# Altium PCB KeyBaord_V0.1.PcbDoc
Units mil, origin at the board's own origin, x right, y up, seen from the top; angles counter-clockwise.
Board outline 787.4 x 866.14 mil, 2 copper layers (Top Layer, Bottom Layer); 26 components, 24 nets, 99 pads, 44 vias.
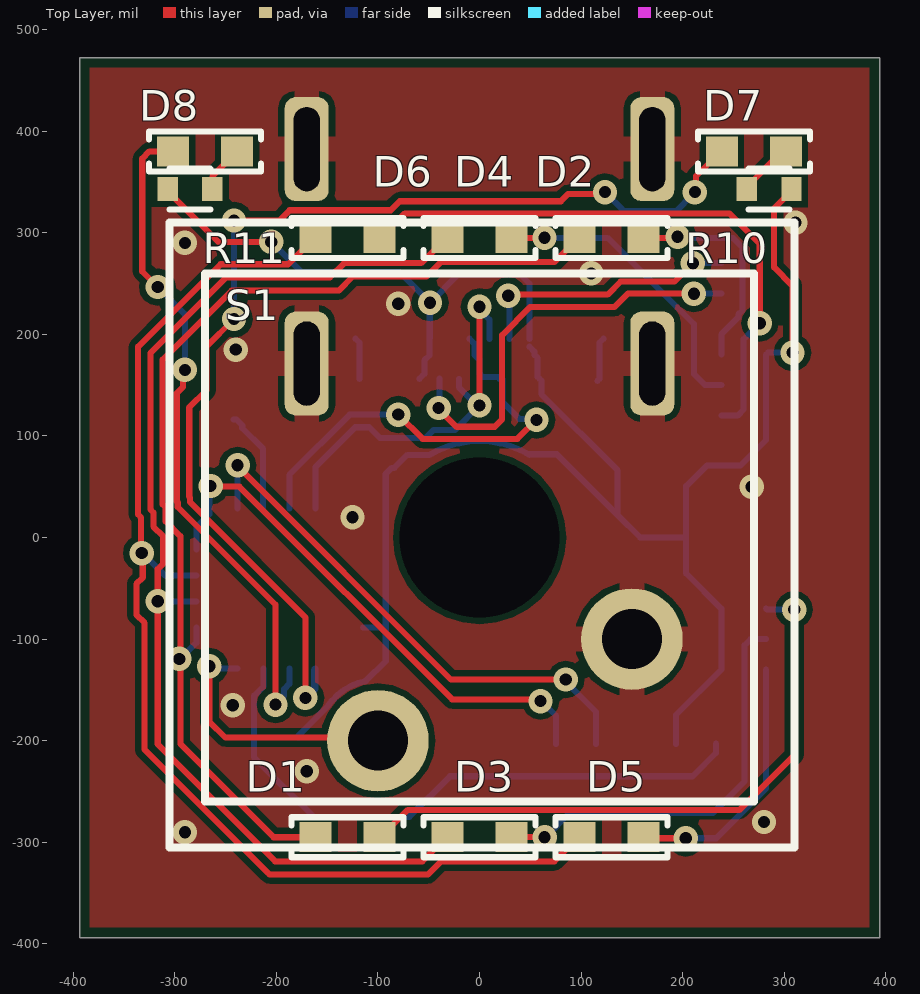
[diagram p0: Top Layer view]
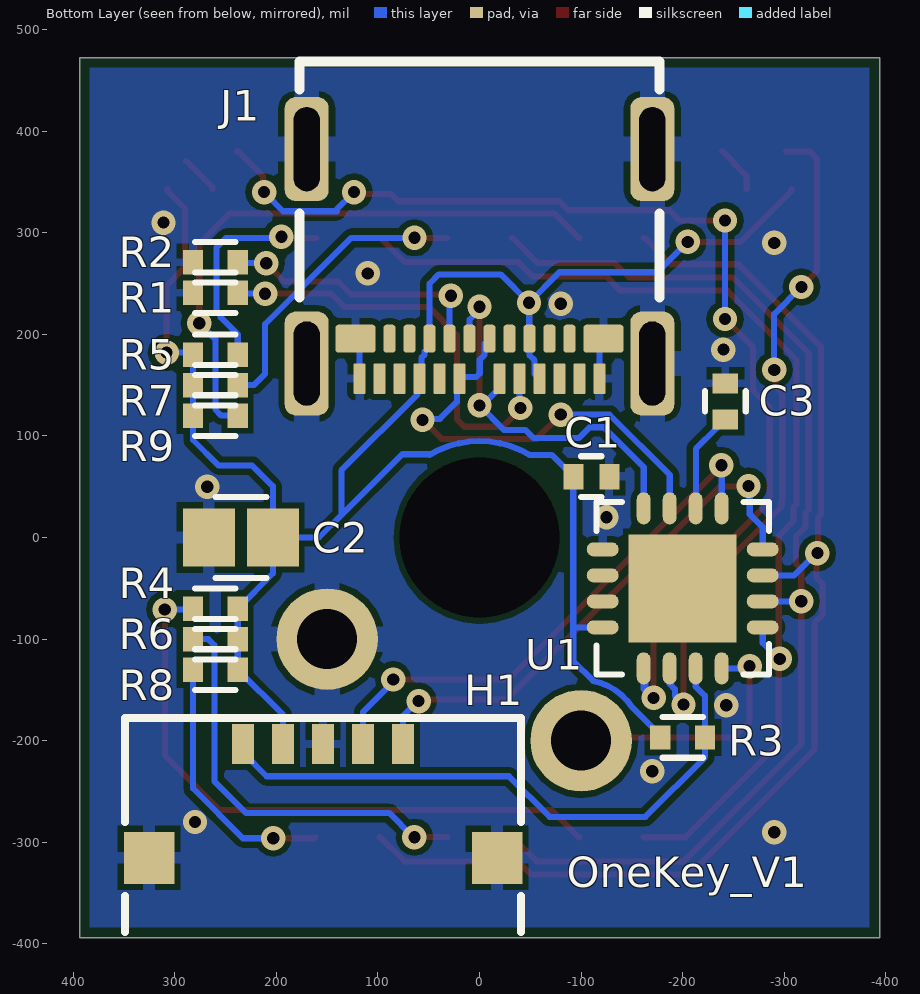
[diagram p1: Bottom Layer view, seen from below]
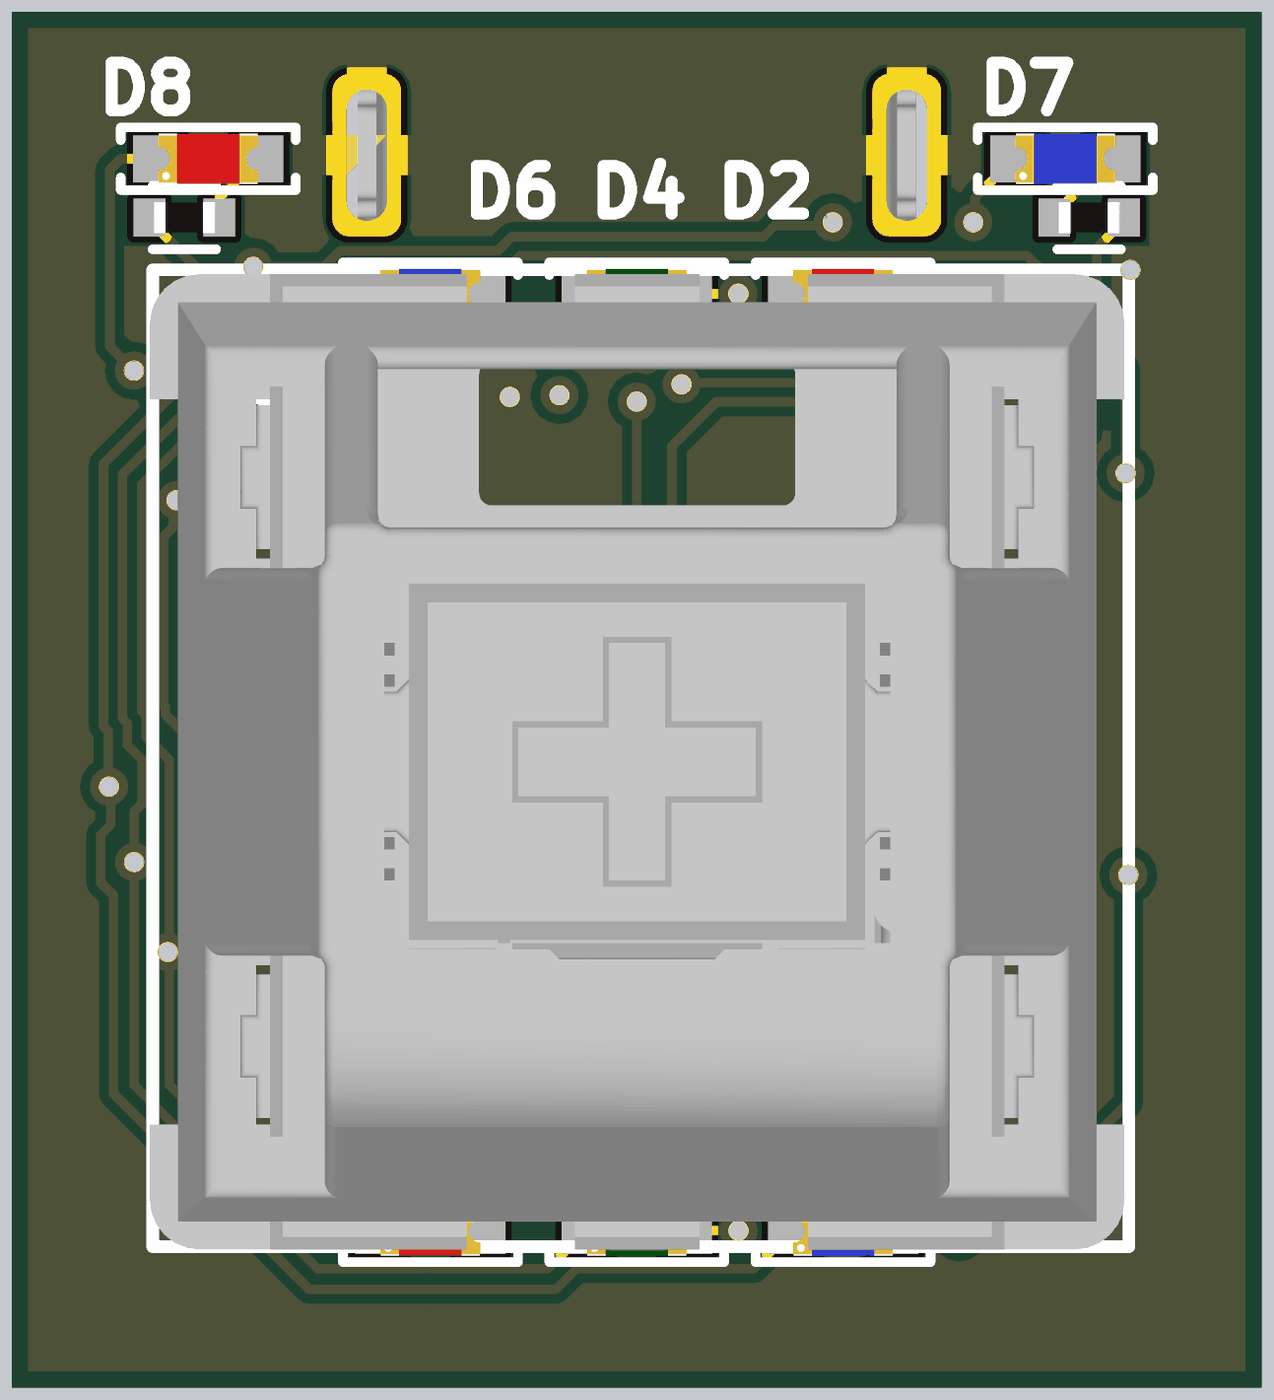
[diagram p2: 3D render of the assembled board from above, using the file's embedded part models]
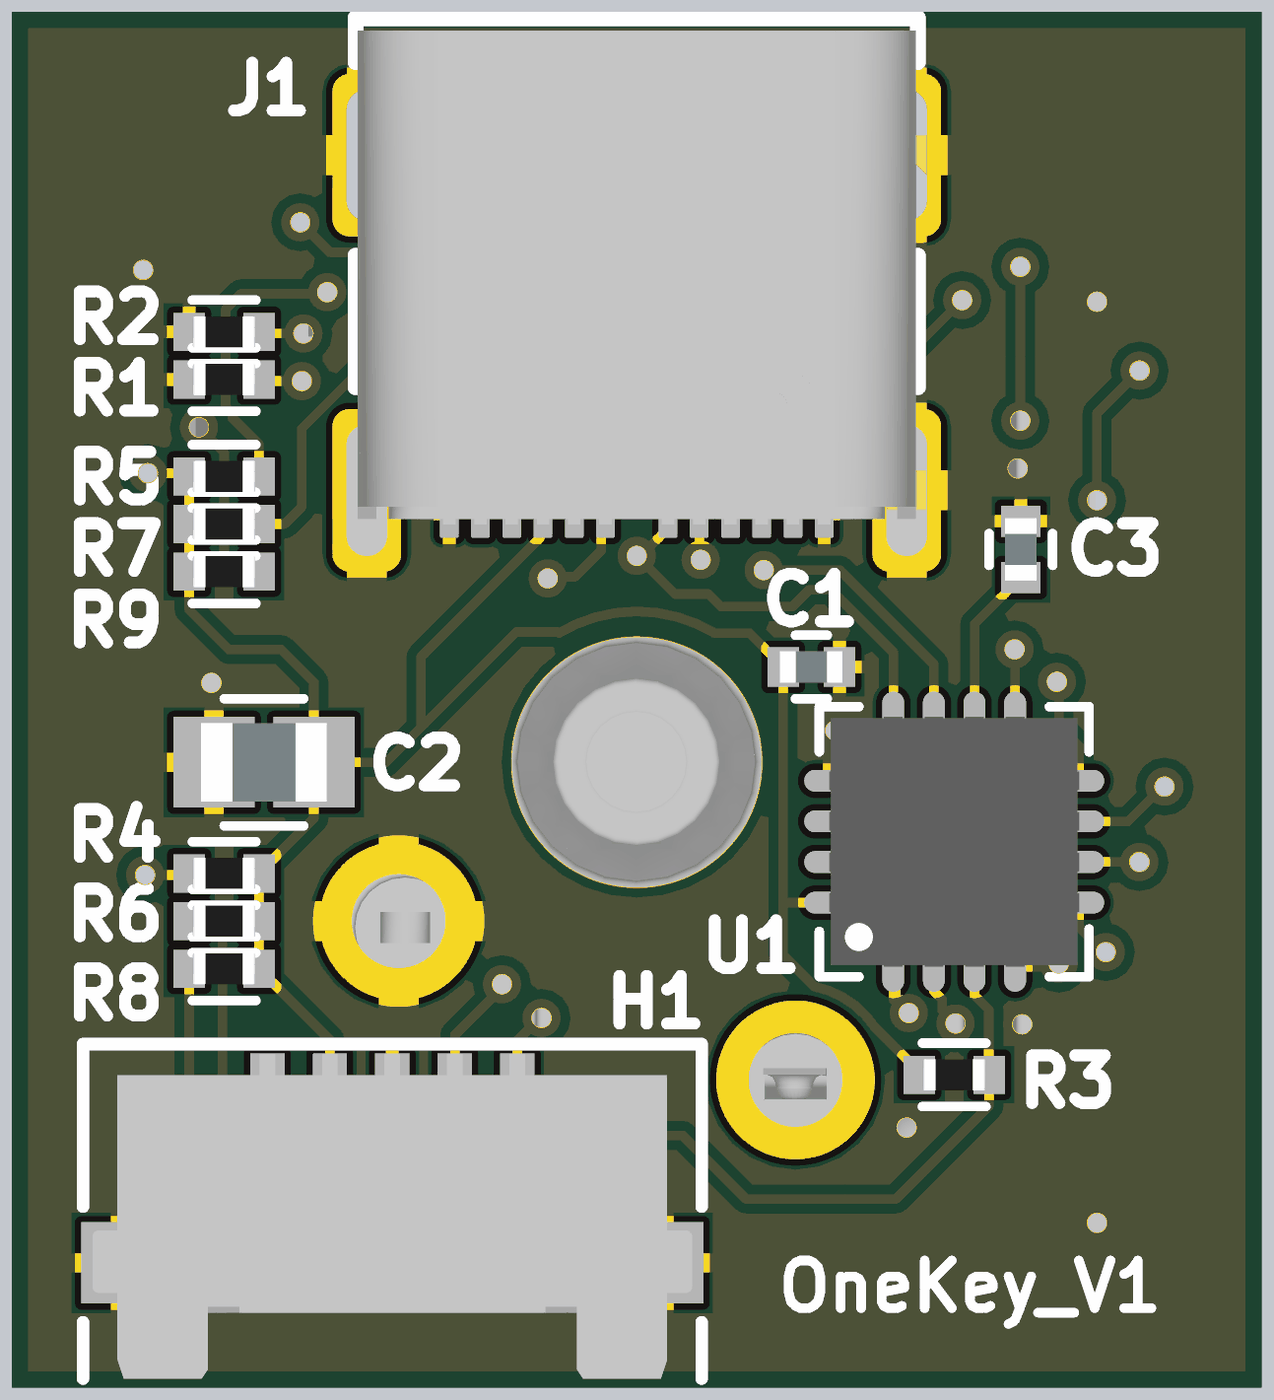
[diagram p3: 3D render of the assembled board from below, using the file's embedded part models]

## Layer stack, top to bottom
Top Solder: solder mask 0.4, Solder Resist, Dk 3.5
Top Layer: signal copper 1.4
Dielectric 1: dielectric 12.6, FR-4, Dk 4.8
Bottom Layer: signal copper 1.4
Bottom Solder: solder mask 0.4, Solder Resist, Dk 3.5

## Board outline
-393.7,-393.7 -393.7,472.44 393.7,472.44 393.7,-393.7

## Design rules (kind name [scope] priority, off if disabled: settings)
BoardOutlineClearance [All] p1: gap=10 ignorepadtopadclearanceinfootprint=FALSE except(0: Arc-SplitContinuation Track-SplitContinuation SMDPad-SplitContinuation THPad-SplitContinuation Via-SplitContinuation Fill-SplitContinuation Poly-SplitContinuation Region-SplitContinuation Text-SplitContinuation)
Clearance [All] p1: gap=6 ignorepadtopadclearanceinfootprint=FALSE except(0: SMDPad-Hole THPad-Hole Via-Hole Fill-Hole Poly-Hole Region-Hole Text-Hole)
HoleSize [All] p1: absolutevalues=TRUE maxlimit=250 minlimit=1 maxpercent=80.000 minpercent=20.000
MinimumSolderMaskSliver [All] p1 off: minsoldermaskwidth=10
PolygonConnect [All] p1: thpad.connectstyle=Relief thpad.reliefconductorwidth=25 thpad.reliefentries=4 thpad.polygonreliefangle="90 Angle" thpad.airgapwidth=6 smdpad.connectstyle=Relief smdpad.reliefconductorwidth=8 smdpad.reliefentries=4 smdpad.polygonreliefangle="90 Angle" smdpad.airgapwidth=6 via.connectstyle=Direct via.reliefconductorwidth=10 via.reliefentries=4 via.polygonreliefangle="90 Angle" via.airgapwidth=10
RoutingVias [All] p1: holewidth=10 width=22 viastyle="Through Hole" minholewidth=12 minwidth=24 maxholewidth=28 maxwidth=50
SilkToSilkClearance [All] p1 off: silktosilkclearance=10
SilkToSolderMaskClearance [IsPad] p1 off: minsilkscreentomaskgap=10 clearancetoexposedcopper=TRUE
SolderMaskExpansion [All] p1: expansion=4 istentingtop=FALSE
Width [All] p1: maxlimit=40 minlimit=6 preferedwidth=6 minimp=50.000000 maximp=50.000000 favimp=50.000000
26 further rules are at their usual default settings.

## Components (designator, comment, footprint, x,y, rotation, side; value= is the part's Value field where it differs from the comment)
C1 "0.1μF" AVX_MLCC_X7R-0402C -110,60 r0 bottom
C2 "1μF" AVX_MLCC_X7R-0805N 234.91,0 r180 bottom
C3 "0.1μF" AVX_MLCC_X7R-0402C -242,134 r270 bottom
D1 "0603 Red" 150060RS55040 -130,-295 r0 top
D2 "0603 Red" 150060RS55040 130,295 r0 top
D3 "0603 Green" 150060GS55040 0,-295 r0 top
D4 "0603 Green" 150060GS55040 0,295 r0 top
D5 "0603 Blue" 150060BS55040 130,-295 r0 top
D6 "0603 Blue" 150060BS55040 -130,295 r0 top
D7 "0603 Blue" 150060BS55040 270,380 r0 top
D8 "0603 Red" 150060RS55040 -270,380 r0 top
H1 "5037630591" 5037630591 154,-203 r0 bottom
J1 "USB-C HORZ" "Molex_USB-C HORZ" 0,314.96 r0 bottom
R1 "5.1kΩ" 0402_2GE 260,241 r0 bottom
R2 "5.1kΩ" 0402_2GE 260,271 r0 bottom
R3 "10kΩ" 0402_2GE -200,-196.8 r180 bottom
R4 "300Ω" 0402_2GE 260,-70 r0 bottom
R5 "300Ω" 0402_2GE 260,180 r180 bottom
R6 "180Ω" 0402_2GE 260,-100 r0 bottom
R7 "180Ω" 0402_2GE 260,150 r180 bottom
R8 "180Ω" 0402_2GE 260,-130 r0 bottom
R9 "180Ω" 0402_2GE 260,120 r180 bottom
R10 "180Ω" 0402_2GE 285,343 r180 top
R11 "300Ω" 0402_2GE -285,343 r0 top
S1 "MX1A-G1NA" MX1A-G1NA 0,0 r180 top locked
U1 "PIC16F1455-I/ML" PIC16F1455-I/ML -200,-50 r90 bottom

## Footprints (in the part's own frame and the unit in brackets; to place one, negate y for a bottom-side part, rotate by r counter-clockwise, add the part's x,y. Pads: shape width x height; smd on the part's side, far side on the other; paste and mask are expansions set on the pad)
0402_2GE [mil]
  rect 20x24 smd: 1(-22,0) 2(22,0)
  silkscreen extent -20,-20 20,20, body extent -20,-10 20,10, height 14
150060BS55040 [mm] "0603"
  rect 0.8x0.75 smd: A(0.8,0) C(-0.8,0)
  silkscreen extent -1.4,-0.5 1.4,0.5, body extent -0.8,-0.4 0.8,0.4, height 0.4
150060GS55040 [mm] "0603"
  rect 0.8x0.75 smd: A(0.8,0) C(-0.8,0)
  silkscreen extent -1.4,-0.5 1.4,0.5, body extent -0.8,-0.4 0.8,0.4, height 0.4
150060RS55040 [mm] "0603"
  rect 0.8x0.75 smd: A(0.8,0) C(-0.8,0)
  silkscreen extent -1.4,-0.5 1.4,0.5, body extent -0.8,-0.4 0.8,0.4, height 0.4
5037630591 [mm]
  rect 0.55x1 smd: 1(-2,0) 2(-1,0) 3(0,0) 4(1,0) 5(2,0)
  rect 1.26x1.3 smd: G(-4.35,2.85) G(4.35,2.85)
  silkscreen extent -4.95,-0.65 4.95,4.7, body extent -4.8,-0.49 4.8,4.7, height 1.48
AVX_MLCC_X7R-0402C [mm] "AVX_MLCC_X7R-0402C"
  rect 0.5x0.635 smd: 1(-0.45,0) 2(0.45,0)
  silkscreen extent -0.25,-0.51 0.25,0.51, body extent -0.5,-0.25 0.5,0.25, height 0.56
AVX_MLCC_X7R-0805N [mm] "AVX_MLCC_X7R-0805N"
  rect 1.3x1.45 smd: 1(-0.8,0) 2(0.8,0)
  silkscreen extent -0.64,-1.02 0.64,1.02, body extent -1,-0.63 1.01,0.63, height 1.4
"Molex_USB-C HORZ" [mm] "CONN USB TYPE C RT. ANGLE JACK"
  rrect20% 0.3x0.76 smd: A1(-3,4.03) A2(-2.5,4.03) A3(-2,4.03) A4(-1.5,4.03) A5(-1,4.03) A6(-0.5,4.03) A7(0.5,4.03) A8(1,4.03) A9(1.5,4.03) A10(2,4.03) A11(2.5,4.03) A12(3,4.03)
  rrect20% 1x0.7 smd: B1(3.1,3.03) B12(-3.1,3.03)
  rrect50% 0.3x0.7 smd: B2(2.25,3.03) B3(1.75,3.03) B4(1.25,3.03) B5(0.75,3.03) B6(0.25,3.03) B7(-0.25,3.03) B8(-0.75,3.03) B9(-1.25,3.03) B10(-1.75,3.03) B11(-2.25,3.03)
  rrect50% 1.1x2.6 hole 0.65 slot 2.1 at 90 deg: M1(-4.32,3.65) M2(-4.32,-1.71) M3(4.32,-1.71) M4(4.32,3.65)
  silkscreen extent -4.5,-3.9 4.5,2, body extent -4.47,-3.7 4.47,4.2, height 3.2
MX1A-G1NA [mm]
  round 2.54 hole 1.5: 1(-3.81,2.54) 2(2.54,5.08)
  round 0 hole 4: 3(0,0)
  silkscreen extent -7.87,-7.87 7.75,7.75, body extent -7.81,-7.81 7.79,7.79, height 15.54
PIC16F1455-I/ML [mm]
  rrect100% 0.8x0.35 smd: 1(-2,0.975) 2(-2,0.325) 3(-2,-0.325) 4(-2,-0.975) 9(2,-0.975) 10(2,-0.325) 11(2,0.325) 12(2,0.975)
  rrect100% 0.35x0.8 smd: 5(-0.975,-2) 6(-0.325,-2) 7(0.325,-2) 8(0.975,-2) 13(0.975,2) 14(0.325,2) 15(-0.325,2) 16(-0.975,2)
  rect 2.7x2.7 smd: 17(0,0)
  body extent -2,-2 2,2, height 0.5

## Part data
C1 C3: library part 0402ZC104MAT2A, "MLCC C0G 0402 10V 0.1μF 20%", Case=0402, Tolerance=20%, Voltage=10V, Capacitance=0.1μF, ID=154, MAN=AVX, MPN=0402ZC104MAT2A
C2: library part 0805ZC105MAT2A, "MLCC C0G 0805 10V 1μF 20%", Case=0805, Tolerance=20%, Voltage=10V, Capacitance=1μF, ID=2348, MAN=AVX, MPN=0805ZC105MAT2A
D1 D2 D8: library part 150060RS55040, "Standard LEDs - SMD WL-SMCD SMD MonoChip 0603 Red 632nm", Current=20mA, Forward Voltage=2V, MAN=Wurth, MPN=150060RS55040
D3 D4: library part 150060GS55040, "Standard LEDs - SMD WL-SMCD SMD Mono SMD 0603 Green 520nm", Current=20mA, Forward Voltage=3.2V, MAN=Wurth, MPN=150060GS55040
D5 D6 D7: library part 150060BS55040, "Standard LEDs - SMD WL-SMCD SMD Mono SMD 0603 Blue 465nm", Current=20mA, Forward Voltage=3.2V, MAN=Wurth, MPN=150060BS55040
H1: "Headers & Wire Housings 1MM PicoLock SMT HDR RA POD SIDELOCK 5CKT", MAN=Molex, MPN=5037630591
J1: library part USB-C_HORZ, "CONN RCP USB3.1 TYPEC 24P SMD RA", Digi-Key Part Number=WM12856CT-ND, MPN=1054500101, MAN=Molex
R1 R2: library part ERJ-2GEJ512X, "Thick Film Resistors - SMD 0402 5.1Kohms 5% AEC-Q200", Case=0402, Tolerance=5%, ID=9247, MAN=Panasonic, MPN=ERJ-2GEJ512X, Resistance=5.1kΩ, Wattage=0.1W
R3: library part ERJ-2GEJ103X, "Thick Film Resistors - SMD 0402 10Kohms 5% AEC-Q200", Case=0402, Tolerance=5%, ID=9123, MAN=Panasonic, MPN=ERJ-2GEJ103X, Resistance=10kΩ, Wattage=0.1W
R4 R5 R11: library part ERJ-2GEJ301X, "Thick Film Resistors - SMD 0402 300ohms 5% AEC-Q200", Case=0402, Tolerance=5%, ID=9202, MAN=Panasonic, MPN=ERJ-2GEJ301X, Resistance=300Ω, Wattage=0.1W
R6 R7 R8 R9 R10: library part ERJ-2GEJ181X, "Thick Film Resistors - SMD 0402 180ohms 5% AEC-Q200", Case=0402, Tolerance=5%, ID=9159, MAN=Panasonic, MPN=ERJ-2GEJ181X, Resistance=180Ω, Wattage=0.1W
S1: "Pushbutton Switches MX RGB, Brown Stem, Full Travel Mechanical Keyswitch Soft click Feel, 55cN, clear housing No Diode Frame Mount (no fixation pins)", MAN=CHERRY, MPN=MX1A-G1NA
U1: "8-bit Microcontrollers - MCU 14KB Fl 1024B R 48MHz Int. Oc 12 I0", MAN="Microchip Technology", MPN=PIC16F1455-I/ML

## Via types
v1: diameter 24, hole 12, Top Layer to Bottom Layer, tented both sides, 44 vias

## Nets (pads, with @x,y where several pads share a name; then routed paths per layer and width w, separated by ;. In a path a pad name is that pad's centre, name@x,y a point inside that pad or via, vN(x,y) a via of type N, cw(c..) or ccw(c..) an arc to the next point about the centre after c; other vN are vias at no path point)
D+: J1.A6 J1.B6 U1.12 | length 397.6
  Top Layer w6: v1@-3.37,225.12 v1@-2.79,224.55 ; v1@0,132.47 v1@0,225.12
  Bottom Layer w6: U1.12 -161.61,69.17 -122.28,108.5 -108.5,108.5 -98,98 -53.04,98 -45.07,105.97 -24.03,105.97 v1(0,130) ; J1.A6@-20,155.98 -20,147.56 -8.16,135.72 -3.25,135.72 v1@0,132.47 ; v1@0,225.12 0,224.18 9.84,214.34 J1.B6
  other v1: 0,227.12
D-: J1.A7 J1.B7 U1.11 | length 444.2
  Top Layer w6: v1(-80,121) -56,97 37.28,97 v1@57.07,116.78
  Bottom Layer w6: U1.11 -187.2,61.72 -127.92,121 v1(-80,121) ; J1.B7 -5.06,190.89 -5.06,179.89 -0.18,175.01 -0.18,161.51 3.33,158 17.98,158 J1.A7 ; J1.A7@22.33,155.94 22.33,133.52 39.07,116.78 v1@57.07,116.78
  other v1: 56.07,115.78
GND: C1.1 C2.1 C3.1 H1.3 J1.A1 J1.A12 J1.B1 J1.B12 J1.M1 J1.M2 J1.M3 J1.M4 R1.2 R2.2 S1.1 U1.13 | length 85.1
  Bottom Layer w6: J1.B12 -118.11,191.73 J1.A1 ; J1.A12@115.93,154.12 J1.A12 118.11,191.73 J1.B1
  other v1: -290,-290 280,-280 -170,-230 -242.8,-165 -125,20 268,50 -240,185 -80,230 110,260 -290,290 311,310
ICSPCLK: H1.1 U1.8 | length 530
  Top Layer w6: v1@-265.7,50.68 -265.1,50.08 -236.44,50.08 -26.97,-159.4 58.4,-159.4 v1(60,-161)
  Bottom Layer w6: U1.8 -278.74,10.17 -266,22.91 -266,49.98 -265.7,50.28 v1@-265.7,50.68 ; v1(60,-161) 61,-162 62,-162 75.26,-175.26 H1.1
  other v1: -264.7,50.68
ICSPDAT: H1.2 U1.9 | length 529.8
  Top Layer w6: v1@-238.06,70.08 -28.22,-139.76 v1(84.92,-139.76)
  Bottom Layer w6: U1.9 -238.39,68.31 -237.7,69 -237.7,69.72 v1@-238.06,70.08 ; v1(84.92,-139.76) 83.24,-139.76 83,-140 114.63,-171.63 H1.2
  other v1: -238.06,71.08
MCLR: H1.5 R3.2 U1.3 | length 605.4
  Bottom Layer w6: U1.3 -212.8,-146.76 -221.8,-155.76 -221.8,-196.8 -222,-197 -222,-216.2 -163.2,-275 -69,-275 -28.93,-234.93 209.67,-234.93 232.74,-211.86 H1.5
NetC3_2: C3.2 U1.10 | length 101.9
  Bottom Layer w6: C3.2 -239.34,116.28 -233.5,110.44 -233.5,107.78 -213,87.28 U1.10@-213,28
NetD1_A: D1.A R4.2 | length 613.1
  Top Layer w6: D1.A -97.52,-295 -70.52,-268 256,-268 309.74,-214.26 v1(309.74,-70.96)
  Bottom Layer w6: R4.2 282.96,-70.96 v1(309.74,-70.96)
NetD1_C: D1.C D2.C U1.5 | length 1054.3
  Top Layer w6: D1.C -202.69,-295 -294.51,-203.18 -294.51,-119.51 -294.51,1.3 -309,15.79 -309,29.58 -312,32.58 -312,175 -244,243 -138.55,243 -124.55,257 -52.1,257 -38.1,271 73.52,271 97.52,295 D2.C
  Bottom Layer w6: v1@-294.51,-119.51 -278.74,-103.74 U1.5
  other v1: -295.51,-119.51
NetD2_A: D2.A R5.2 | length 217.2
  Top Layer w6: D2.A@160.51,295 D2.A v1@195,295
  Bottom Layer w6: v1@194,295 v1@194.5,294.5 ; v1@195,295 249.31,295 259,285.31 259,223.81 254.84,219.66 254.84,216.84 238,200 R5.2
  other v1: 195,296
NetD3_A: D3.A R6.2 | length 409.8
  Top Layer w6: D3.A 31.58,-294.92 v1@65.08,-294.92
  Bottom Layer w6: v1@65.08,-294.92 89,-271 230,-271 261,-240 261,-106 267,-100 R6.2
  other v1: 64.08,-294.92
NetD3_C: D3.C D4.C U1.6 | length 1112.4
  Top Layer w6: D3.C -32.48,-295 -56.24,-318.76 -201.24,-318.76 -316.68,-203.32 -316.68,-31.16 -311.51,-25.98 -311.51,1.33 -321,10.82 -321,24.61 -324,27.61 -324,181.38 -249.38,256 -147.24,256 -133.24,270 -57.48,270 -32.48,295 D4.C
  Bottom Layer w6: v1(-316.68,-62.8) U1.6
NetD4_A: D4.A R7.2 | length 295.8
  Top Layer w6: D4.A 64.85,295 v1@65.26,294.59
  Bottom Layer w6: v1@65,295 126.14,295 211,210.14 211,161 222,150 R7.2
  other v1: 64,295
NetD5_A: D5.A R8.2 | length 258.2
  Top Layer w6: D5.A 162.5,-296 v1(203,-296)
  Bottom Layer w6: v1(203,-296) 233,-296 282,-247 R8.2
NetD5_C: D5.C D6.C U1.7 | length 1177.1
  Top Layer w6: -208.24,-330.15 -329.68,-208.7 -329.68,-84 -337.68,-76 -337.68,-45.68 -331.51,-39.51 -331.51,-15.32 -333,-13.83 -333,19.64 -336,22.64 -336,187.77 -254.77,269 -188.48,269 -162.48,295 D6.C ; -206.62,-331.76 -50.86,-331.76 -37.86,-318.76 73.76,-318.76 97.52,-295 D5.C
  Bottom Layer w6: v1@-331.51,-15.32 -309.62,-37.2 U1.7
  other v1: -332.51,-15.32
NetD6_A: D6.A R9.2 | length 590.9
  Top Layer w6: D6.A -97.52,295 -73.52,319 246,319 275.84,289.16 v1(275.84,210.96)
  Bottom Layer w6: R9.2 254,120 260,126 260,195.11 v1(275.84,210.96)
NetD7_A: D7.A R10.2 | length 38.4
  Top Layer w6: R10.2 263,345 D7.A@288.75,370.75
NetD8_A: D8.A R11.2 | length 47.7
  Top Layer w6: R11.2 -263,355.5 -251.25,367.25 -251.25,368.24 -239.49,380 D8.A
NetJ1_A5: J1.A5 R1.1 | length 417.4
  Top Layer w6: v1@-37.47,126.47 -37.47,123.7 -22.77,109 15,109 22.21,116.21 22.21,199.27 49.95,227 133,227 146,240 v1@210,240
  Bottom Layer w6: v1@-40.23,126.47 -39.37,127.33 J1.A5 ; v1@210,240 R1.1@238,240
  other v1: -40.23,127.47 211,240
NetJ1_B5: J1.B5 R2.1 | length 265.1
  Top Layer w6: v1@29.21,239 126,239 139,252 192,252 v1(210,270)
  Bottom Layer w6: v1@29.21,239 29.37,238.84 29.37,195.83 J1.B5 ; v1(210,270) R2.1@238,270
  other v1: 28.21,238
NetS1_2: S1.2 U1.4 | length 256.3
  Top Layer w6: v1(-265.84,-126.75) -265.84,-181.16 -250,-197 -103,-197 S1.2
  Bottom Layer w6: v1(-265.84,-126.75) -263.85,-128.74 U1.4
SIG1: D7.C U1.1 | length 1124.4
  Top Layer w6: v1(-241.65,215.07) -269,187.72 -269,144.7 -285.7,128 -285.7,40.23 -285,39.53 -285,35 -171.37,-78.63 v1(-171.37,-157.89) ; v1@-241.65,311 -239.72,312.93 v1@-237.79,311 ; v1@-237.79,312 -197,312 -186.9,322.1 -87.39,322.1 -78.49,331 80,331 87,338 v1@125.49,338 ; v1@210,338 213.06,341.06 213.06,355.54 237.52,380 D7.C
  Bottom Layer w6: v1@-241.65,217.07 v1@-241.65,311 ; v1@-169.37,-156.89 -161.61,-149.13 U1.1 -163.1,-130.23 -163.1,-150.1 v1@-167.89,-154.89 ; v1@125.49,338 140.39,323.1 ; 140.39,321.1 193.42,321.1 210,337.68 v1@210,338
  other v1: -241.65,312 123.49,340 212,340
SIG2: D8.C U1.2 | length 673.8
  Top Layer w6: v1(-316.77,246.6) -332,261.83 -332,373 -325,380 D8.C ; v1@-292,165 -292,148 -298,142 -298,35.56 -297,34.56 -297,30.03 -200.8,-66.18 v1(-200.8,-164.45) ; v1@-197.8,-161.45 v1@-196.8,-162.45
  Bottom Layer w6: v1(-316.77,246.6) -290,219.83 v1(-290,165) ; v1(-200.8,-164.45) -192.37,-156.03 -192.37,-149.19 -187.2,-144.02 U1.2
VUSB: C1.2 C2.2 H1.4 J1.A4 J1.A9 J1.B4 J1.B9 R3.1 R4.1 R5.1 R6.1 R7.1 R8.1 R9.1 R10.1 R11.1 U1.16 | length 2090.8
  Top Layer w6: R11.1 -307,341 -257,291 v1(-205.03,291) ; v1(-48.71,231.12) v1@-47.67,230.08 ; R10.1 307,341 290,324 290,266 308,248 v1(308,182)
  Bottom Layer w6: v1(-205.03,291) -175.09,261.06 -78.65,261.06 v1(-48.71,231.12) ; R3.1 -178,-194.8 -149.93,-166.73 cw(c-100,-200) -111.77,-141.17 -92.28,-121.68 -92.28,-88.39 ; U1.16@-114.77,-88.39 -92.28,-88.39 ; J1.A4 -54.28,161.08 -54.28,174.3 -49.21,179.36 J1.B9 -48.96,195.92 -48.96,230.87 v1(-48.71,231.12) ; 49.04,81.37 ccw(c0,0) -49.04,81.37 -70.92,81.37 -83.78,68.5 -86.44,68.5 -92.28,62.66 C1.2 -92.28,-88.39 ; J1.B4@49.21,187.8 53.99,183.02 53.99,179.89 57.15,176.73 57.15,158.2 J1.A9 60.96,154.39 60.96,141.18 136,66.14 136,22 ; J1.B4 49.21,249.79 40,259 -20.83,259 v1(-48.71,231.12) ; 49.42,82 76,82 136,22 ; H1.4 193.37,-174.63 R8.1 R6.1 R4.1 203.42,-35.42 C2.2 ; v1(308,182) 284,182 R5.1 R7.1 R9.1 282,96 257,71 224,71 203.42,50.42 C2.2 ; 136,22 158,0 C2.2
pads on no net: H1.G J1.A2 J1.A3 J1.A8 J1.A10 J1.A11 J1.B2 J1.B3 J1.B8 J1.B10 J1.B11 S1.3 U1.14 U1.15 U1.17

## Polygon pours and split planes (outlines as drawn)
GND on Bottom Layer "GND_L02_P002" (solid, remove dead copper, pour order 2): -450,500 -450,-450 450,-450 450,500
GND on Top Layer "GND_L01_P000" (solid, remove dead copper, pour order 0): -450,500 -450,-450 450,-450 450,500

## Silkscreen, mask and mechanical layers (free items; w line width, h text height)
Bottom Overlay:
  lines w6: -285,-135 -260,-135 ; -285,-133.47 -285,-105 ; -285,6.53 -285,35 -260,35 ; -140,-135 -115,-135 -115,-106.53 ; -140,35 -115,35 -115,6.53
  text "OneKey_V1" at -86,-344 h30
Mechanical 1:
  the board outline again, w0